# EAGLE board platiene1_v43_eagle (EAGLE 9.7.0)
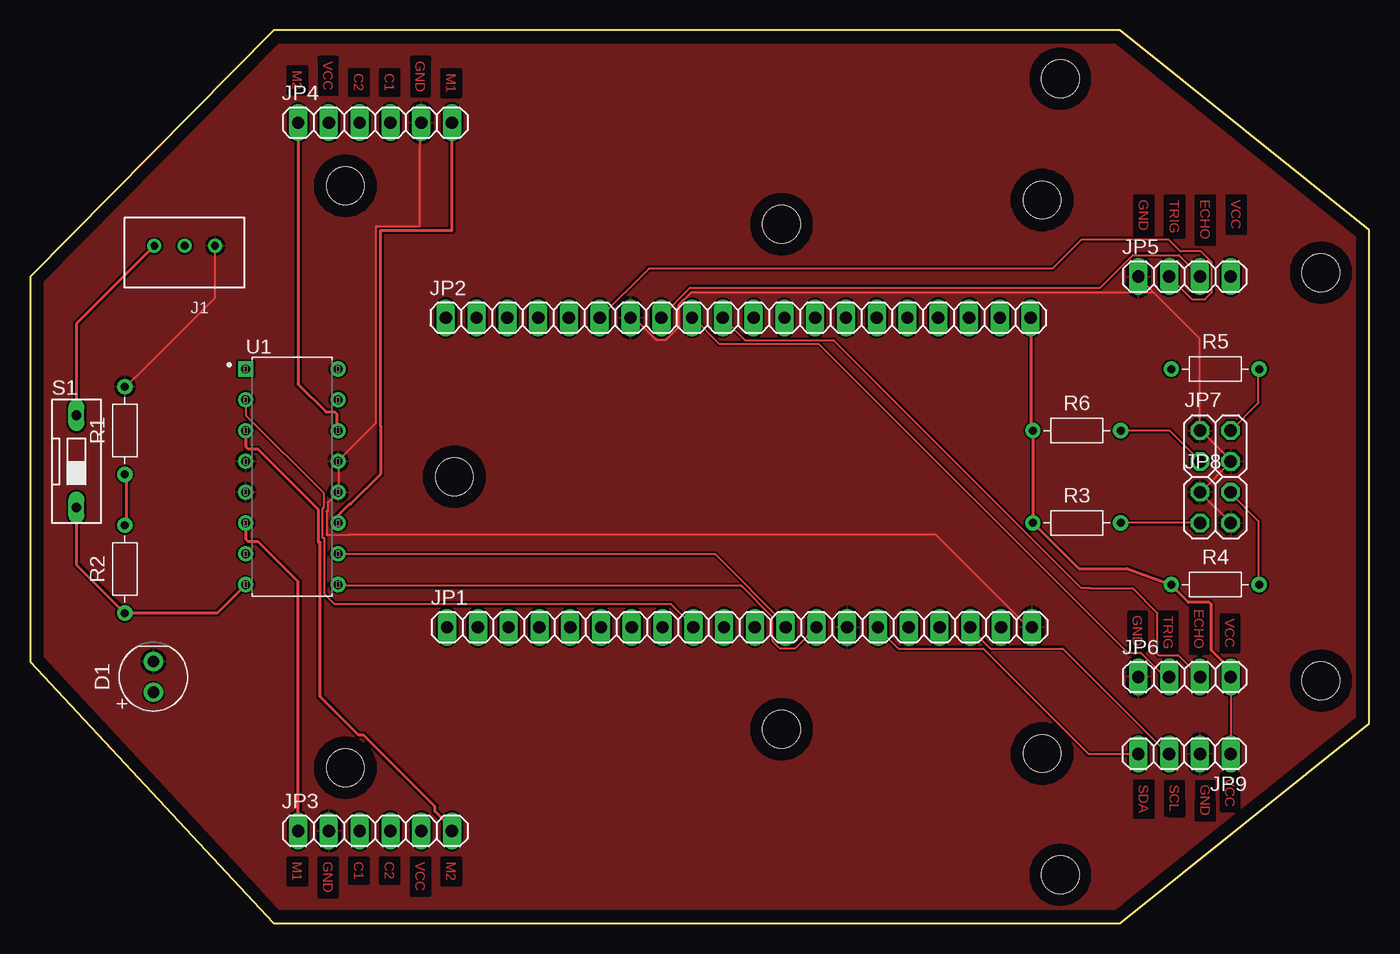
[diagram p0: board, top side]
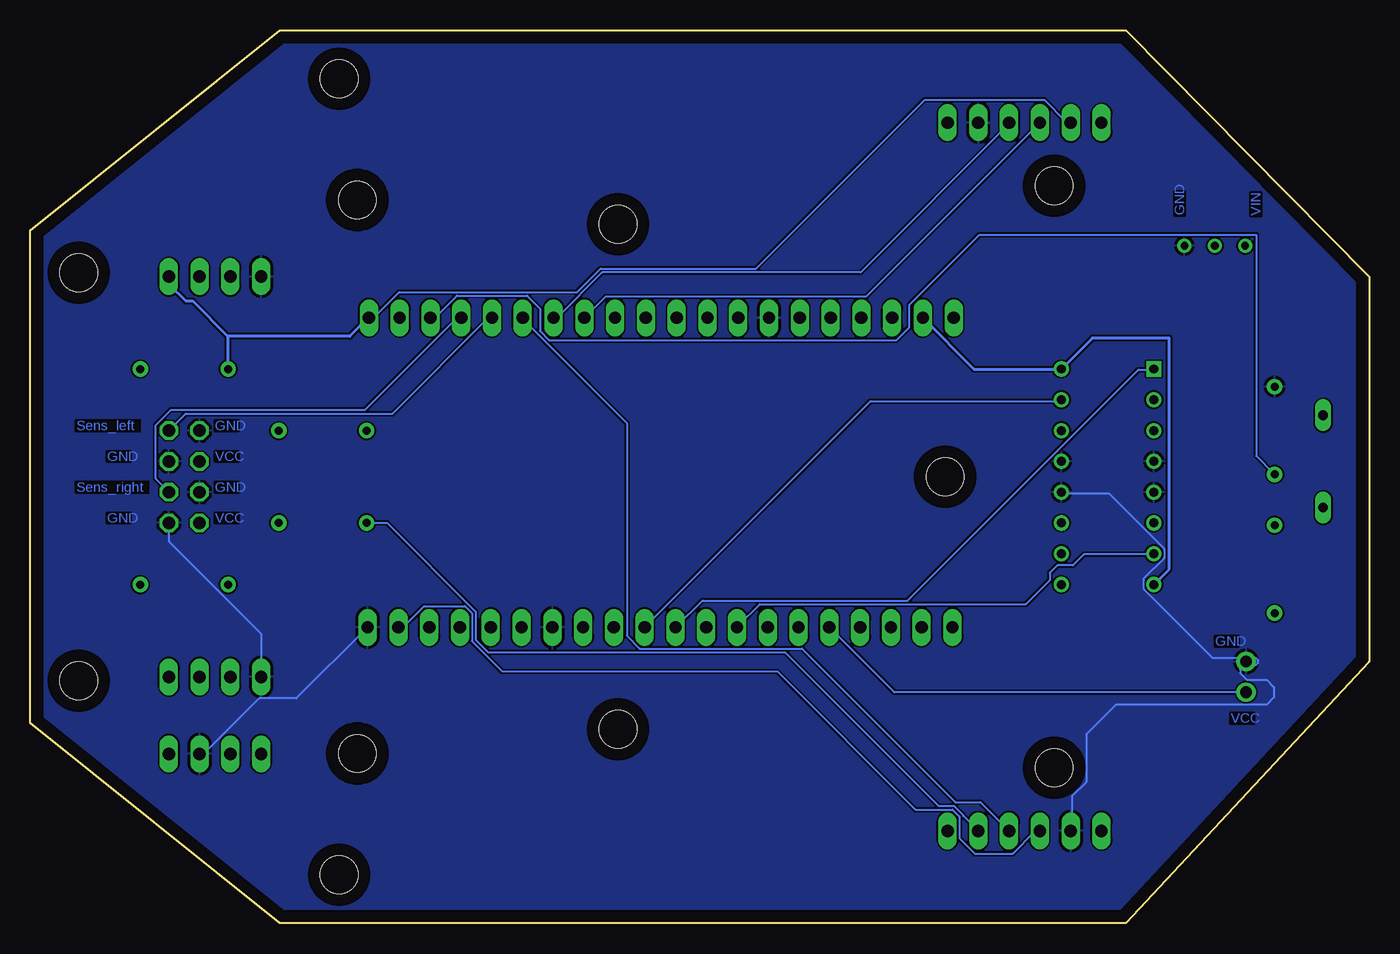
[diagram p1: board, bottom side, seen from below]

Size 110.49 x 73.66 mm. Coordinates in mm from the lower left corner, seen from the top.
Outline: 0,53.34 0,21.59 20.07,0 89.92,0 110.49,16.51 110.49,57.15 89.92,73.66 20.07,73.66 0,53.34
Copper layers (1*16): Top 0.035mm / dielectric 1.5mm / Bottom 0.035mm
Design rules "default": minimum track width 6mil, minimum drill 0.35mm, track to track 6mil, track to pad 6mil, pad to pad 6mil, via to via 6mil, smd to smd 6mil, copper to edge 40mil, drill to drill 6mil, minimum pad ring 10mil, minimum via ring 8mil, stop-mask expansion 4mil, vias tented up to drill 0mil, thermal gap 10mil
Holes 3.1 mm at 85,4 83.5,14 62,16 62,57.66 83.5,59.66 85,69.66 26,12.83 26,60.83 35,36.83 106.49,53.66 106.49,20

## Footprints (pad centres in the part's own frame; a part is rotated, then mirrored left to right if it is on the bottom)
LEDRD254W60D565H860B = drill 0.981 pad 1.581: 1 -1.27,0; 2 1.27,0
B3B-XH-A = drill 0.64: 1 0,0; 2 2.5,0; 3 5,0
1X20 = drill 1.016 long: 1 -24.13,0; 2 -21.59,0; 3 -19.05,0; 4 -16.51,0; 5 -13.97,0; 6 -11.43,0; 7 -8.89,0; 8 -6.35,0; 9 -3.81,0; 10 -1.27,0; 11 1.27,0; 12 3.81,0; 13 6.35,0; 14 8.89,0; 15 11.43,0; 16 13.97,0; 17 16.51,0; 18 19.05,0; 19 21.59,0; 20 24.13,0
1X06 = drill 1.016 long: 1 -6.35,0; 2 -3.81,0; 3 -1.27,0; 4 1.27,0; 5 3.81,0; 6 6.35,0
1X04 = drill 1.016 long: 1 -3.81,0; 2 -1.27,0; 3 1.27,0; 4 3.81,0
2X02 = drill 1.016 octagon: 1 -1.27,-1.27; 2 -1.27,1.27; 3 1.27,-1.27; 4 1.27,1.27
RESAD724W46L381D178B = drill 0.66 pad 1.26: 1 -3.62,0; 2 3.62,0
DS-01 = drill 0.813 long: 1 0,-3.81; 2 0,3.81
DIP-16_300MIL = drill 0.74 pad 1.14 square: 1 -3.81,8.89 | drill 0.74 pad 1.14: 2 -3.81,6.35; 3 -3.81,3.81; 4 -3.81,1.27; 5 -3.81,-1.27; 6 -3.81,-3.81; 7 -3.81,-6.35; 8 -3.81,-8.89; 9 3.81,-8.89; 10 3.81,-6.35; 11 3.81,-3.81; 12 3.81,-1.27; 13 3.81,1.27; 14 3.81,3.81; 15 3.81,6.35; 16 3.81,8.89

## Placement (x,y rotation side)
D1  LED_RED  [LEDRD254W60D565H860B]  10.16,20.32 90 top
J1  7.4V  [B3B-XH-A]  15.24,55.88 180 top
JP1  PinLeiste 1 ESP32  [1X20]  58.52,24.41 0 top
JP2  PINLeiste2 ESP32  [1X20]  58.42,49.95 0 top
JP3  Motor_1  [1X06]  28.45,7.62 0 top
JP4  Motor_2  [1X06]  28.45,66.04 0 top
JP5  Ultraschall_2  [1X04]  95.25,53.34 0 top
JP6  Ultraschall_1  [1X04]  95.25,20.32 0 top
JP7  Liniensensor_2  [2X02]  97.79,39.37 0 top
JP8  Liniensensor_1  [2X02]  97.79,34.29 0 top
JP9  I2C  [1X04]  95.25,13.97 180 top
R1  7,5k  [RESAD724W46L381D178B]  7.81,40.64 90 top
R2  30k  [RESAD724W46L381D178B]  7.81,29.21 90 top
R3  100  [RESAD724W46L381D178B]  86.36,33.02 0 top
R4  10k  [RESAD724W46L381D178B]  97.79,27.94 0 top
R5  10k  [RESAD724W46L381D178B]  97.79,45.72 0 top
R6  100  [RESAD724W46L381D178B]  86.36,40.64 0 top
S1  DS01  [DS-01]  3.81,38.1 0 top
U1  L293DNE  [DIP-16_300MIL]  21.59,36.83 0 top

## Library data of the parts
D1 = Opto-Electronic; CATEGORY: Opto-Electronic; SUB-CATEGORY: LED
J1 = Connector; CATEGORY: CONNECTOR; DESCRIPTION: 2.5mm pitch/disconnectable crimp style connector; MANUFACTURER: JST (XH connector); MPN: B3B-XH-A; PART_STATUS: ACTIVE; ROHS_COMPLIANT: COMPLIANT; SERIES: B3B-XH-A; SUB_CATEGORY: THROUGH HOLE CONNECTOR; TYPE: SIDE ENTRY
JP1-JP9 = Connector; CATEGORY: CONNECTOR; SUB-CATEGORY: PIN-HEADER
R1-R6 = Resistor; CATEGORY: Resistor; SUB-CATEGORY: Fixed
S1 = Switch; CATEGORY: SWITCH; TYPE: SPST
U1 = IC; CREATED_BY: PCBLayout.com; DIGI-KEY_PART: 296-9518-5-ND; MANUFACTURER: Texas Instruments; MPN: L293DNE; PACKAGE: DIP-16

## Nets
GND: D1.2 J1.1 JP1.14 JP1.20 JP2.7 JP3.2 JP4.5 JP5.1 JP6.1 JP7.2 JP7.3 JP8.2 JP8.3 JP9.2 R1.2 U1.4 U1.5 U1.12 U1.13
N$1: JP1.11 U1.15
N$2: JP1.12 U1.10
N$3: JP1.13 U1.9
N$4: JP1.10 U1.1
N$5: JP1.8 U1.7
N$6: JP1.9 U1.2
N$7: JP2.2 R2.1 S1.1 U1.8 U1.16
N$8: JP2.18 R1.1 R2.2
N$9: JP4.6 U1.11
N$10: JP4.1 U1.14
N$11: JP3.6 U1.3
N$12: JP3.1 U1.6
N$13: JP2.20 JP3.5 JP4.2 JP5.4 JP6.4 JP9.1 R3.1 R4.1 R5.1 R6.1
N$15: JP8.1 R3.2
N$16: JP2.6 JP5.2
N$17: JP7.1 R6.2
N$18: JP2.16 JP7.4 R5.2
N$19: JP2.17 JP8.4 R4.2
N$20: D1.1 JP1.5
N$21: JP2.8 JP5.3
N$22: JP2.9 JP6.2
N$23: JP2.13 JP4.3
N$24: JP2.10 JP6.3
N$27: JP2.14 JP4.4
N$28: JP2.15 JP3.4
N$29: JP1.19 JP3.3
N$30: JP1.18 JP9.3
N$31: JP1.15 JP9.4
VCC: J1.3 S1.2

## Tracks (layer width: path | path; a pad name or v marks a point on that pad's centre or on a via)
GND
  Top 0.152: J1.1 15.24,51.61 9.75,46.13 7.92,44.3 | JP4.5 32.16,65.94 32.16,57.51 28.54,57.51 28.54,41.29 25.4,38.15 U1.13 25.45,38.05 25.45,35.61 U1.12 24.54,34.7 24.54,33.97 24.45,33.97 24.45,32.07 26.35,32.07 26.35,32.11 74.68,32.11 82.3,24.49 82.6,24.49 JP1.20 | JP8.3 JP8.2 96.62,35.61 99.06,38.05 JP7.3 99.06,38.2 96.62,40.64 JP7.2 96.47,40.64 96.47,48.26 92.71,52.02 | 92.71,52.02 54.51,52.02 53.49,51 53.49,49.17 52.43,48.11 51.66,48.11 49.84,49.94 49.53,49.94 JP2.7 | 92.71,52.02 91.44,53.29 JP5.1
  Bottom 0.152: JP9.2 96.16,13.97 91.59,18.54 88.54,18.54 82.75,24.33 JP1.20 | JP3.2 24.54,7.72 24.54,10.46 23.36,11.64 23.36,15.57 20.9,18.03 8.47,18.03 7.87,18.63 7.87,19.47 8.47,20.07 10.09,20.07 10.64,20.62 10.64,20.93 10.29,21.29 9.37,21.29 9.2,21.46 9.2,21.72 9.37,21.89 12.94,21.89 18.63,27.59 18.63,28.41 16.92,30.12 16.92,30.89 21.49,35.46 25.3,35.46 U1.12 | JP6.1 91.44,23.88 99.06,31.5 JP8.3
  pour Top: 88.9,71.12 19.05,71.12 19.05,68.58 16.51,68.58 16.51,66.04 13.97,66.04 13.97,63.5 11.43,63.5 11.43,60.96 8.89,60.96 8.89,59.69 6.35,59.69 6.35,57.15 2.54,57.15 2.54,21.59 6.35,21.59 6.35,19.05 11.43,19.05 11.43,12.7 13.97,12.7 13.97,8.89 17.78,8.89 17.78,3.81 19.05,3.81 19.05,1.27 90.17,1.27 90.17,7.62 93.98,7.62 93.98,10.16 99.06,10.16 99.06,12.7 101.6,12.7 101.6,16.51 106.68,16.51 106.68,58.42 104.14,58.42 104.14,60.96 100.33,60.96 100.33,63.5 96.52,63.5 96.52,66.04 92.71,66.04 92.71,68.58 88.9,68.58
  pour Bottom: 20.32,73.66 0,53.34 0,21.59 20.32,0 90.17,0 110.49,16.51 110.49,57.15 90.17,73.66
  pour Top: -12.7,78.74 113.03,78.74 113.03,-7.62 -12.7,-7.62
  pour Bottom: -11.43,78.74 -11.43,-3.81 111.76,-3.81 111.76,78.74
N$1
  Bottom 0.152: U1.15 25.45,43.08 41.15,43.08 59.74,24.49 JP1.11
N$2
  Top 0.152: JP1.12 62.33,24.64 56.54,30.43 25.45,30.43 U1.10
N$3
  Top 0.152: U1.9 25.45,27.84 58.67,27.84 61.27,25.25 61.27,23.27 61.87,22.66 63.09,22.66 64.77,24.33 JP1.13
N$4
  Bottom 0.152: U1.1 17.83,45.67 19.05,45.67 38.1,26.62 55.02,26.62 57.15,24.49 JP1.10
N$5
  Bottom 0.152: U1.7 17.83,30.43 23.54,30.43 24.45,29.53 25.72,29.53 26.35,28.89 26.35,28.31 28.35,26.31 50.29,26.31 52.12,24.49 JP1.8
N$6
  Top 0.152: U1.2 17.83,43.08 17.83,41.86 24.23,35.46 24.23,34.28 24.14,34.28 24.14,31.76 24.28,31.76 24.28,27.15 25.12,26.31 52.88,26.31 54.71,24.49 JP1.9
N$7
  Top 0.254: S1.1 3.81,29.59 R2.1 15.43,25.59 U1.8
  Bottom 0.254: JP2.2 32.6,45.72 U1.16 22.86,48.26 16.51,48.26 16.51,29.21 U1.8
N$8
  Top 0.152: 7.92,32.87 R2.2 | R1.1 7.92,36.98
  Top 0.254: 7.92,36.98 7.92,32.87
  Bottom 0.152: JP2.18 77.42,50.09 76.96,50.09 75.29,51.77 69.49,51.77 68.43,50.7 68.43,48.87 67.67,48.11 39.01,48.11 37.95,49.17 37.95,51 32.16,56.79 9.34,56.79 9.34,38.55 7.92,37.13 R1.1
N$9
  Top 0.152: U1.11 25.45,33.02 25.45,33.7 | 34.8,65.53 JP4.6
  Top 0.254: 25.45,33.7 26.3,34.55 26.41,34.55 28.89,37.04 28.89,40.64 28.89,41.03 28.89,57.15 34.8,57.15 JP4.6
N$10
  Top 0.152: 25.3,40.64 U1.14
  Top 0.254: 25.3,40.64 25.3,42.01 25.14,42.17 24.39,42.17 22.1,44.47 JP4.1
N$11
  Top 0.152: 17.83,40.64 U1.3 | JP3.6 34.9,7.72
  Top 0.254: 17.83,40.64 17.83,39.27 17.99,39.1 18.79,39.1 23.79,34.1 23.79,31.41 23.93,31.41 23.93,18.69 27.1,15.52 27.5,15.52 33.4,9.63 33.4,9.22 34.9,7.72
N$12
  Top 0.152: 17.83,33.02 U1.6
  Top 0.254: 17.83,33.02 17.83,31.65 17.99,31.48 18.79,31.48 22.1,28.17 JP3.1
N$13
  Top 0.152: 94.18,27.84 R4.1 | 99.06,20.37 JP6.4 JP9.1 | 82.75,40.64 R6.1 82.6,40.64 | 82.75,33.02 R3.1 | 82.6,49.94 JP2.20
  Top 0.254: 82.75,40.64 82.75,33.02 86.51,29.26 90.55,29.26 R4.1 | 82.6,40.64 82.6,49.94 | 99.06,20.37 99.06,20.93 97.46,22.53 97.46,26.3 97.3,26.46 95.56,26.46 94.18,27.84
  Bottom 0.152: 94.18,45.82 R5.1 | JP5.4 99.06,53.29 | JP4.2 24.69,66.09 24.99,66.09 26.82,67.92 36.68,67.92 50.6,54 63.42,54 65.35,52.07 80.05,52.07 82.17,49.95 JP2.20 82.6,49.94 | R3.1 81.04,33.02 73.74,25.71 73.74,23.39 72.69,22.35 48.21,22.35 35.53,9.68 34.26,9.68 33.5,8.92 33.5,8.86 JP3.5
  Bottom 0.254: 94.18,48.41 94.18,45.82 | 94.18,48.41 84.12,48.41 82.6,49.94 | 94.18,48.41 97.1,51.33 97.66,51.33 99.06,52.73 99.06,53.29
N$15
  Top 0.152: JP8.1 R3.2
N$16
  Top 0.152: JP5.2 95.86,51.46 96.93,51.46 97.51,52.05 97.51,54.51 96.6,55.42 94.92,55.42 93.94,56.4 86.75,56.4 84.35,54 51.05,54 JP2.6
N$17
  Top 0.152: R6.2 94.03,40.64 96.47,38.2 JP7.1
N$18
  Top 0.152: JP7.4 101.35,42.93 101.35,45.67 R5.2
  Bottom 0.152: JP2.16 72.39,49.94 72.69,49.94 80.59,42.04 97.66,42.04 JP7.4
N$19
  Top 0.152: R4.2 101.35,27.99 101.35,33.17 99.06,35.46 JP8.4
  Bottom 0.152: JP2.17 74.98,49.94 75.29,49.94 82.88,42.34 98.88,42.34 100.13,41.1 100.13,36.68 99.06,35.61 JP8.4
N$20
  Bottom 0.152: D1.1 39.19,19.05 JP1.5
N$21
  Top 0.152: JP2.8 52.12,50.09 54.46,52.43 88.29,52.43 90.98,55.12 94.79,55.12 96.47,53.44 JP5.3
N$22
  Top 0.152: JP6.2 93.88,20.37 93.57,20.37 91.65,22.29 90.57,22.29 65.06,47.8 56.84,47.8 54.71,49.94 JP2.9
N$23
  Bottom 0.152: JP4.3 41.52,51.7 63.02,51.7 JP2.13
N$24
  Top 0.152: JP2.10 57.15,49.94 58.98,48.11 66.29,48.11 86.72,27.69 87.43,27.69 87.43,27.63 90.97,27.63 92.97,25.63 92.97,22.24 93.11,22.11 94.73,22.11 JP6.3
N$27
  Bottom 0.152: JP2.14 67.21,50.09 66.9,50.09 63.3,53.7 41.96,53.7 29.72,65.94 JP4.4
N$28
  Bottom 0.152: JP2.15 69.95,49.94 61.27,41.25 61.27,23.72 60.2,22.66 46.81,22.66 34.13,9.98 32.08,9.98 JP3.4
N$29
  Bottom 0.152: JP3.3 27.28,7.57 27.58,7.57 29.41,5.74 32.54,5.74 33.81,7.01 33.81,8.79 34.39,9.37 37.44,9.37 48.85,20.78 71.55,20.78 74.04,23.27 74.04,25.59 74.62,26.17 77.98,26.17 79.73,24.41 JP1.19
N$30
  Top 0.152: JP9.3 93.88,13.97 85.19,22.66 79.25,22.66 77.57,24.33 JP1.18
N$31
  Top 0.152: JP9.4 87.33,13.97 78.64,22.66 71.63,22.66 69.95,24.33 JP1.15
VCC
  Top 0.254: J1.3 3.81,49.45 S1.2

## Text on the board
Top: VCC | GND | M2 | C2 | C1 | M1 | GND | TRIG | ECHO | VCC | ECHO | GND | TRIG | VCC | VCC | SDA | SCL | GND | M1 | GND | C1 | C2 | VCC | M2
Bottom: VIN | GND | GND | Sens_left | VCC | GND | GND | Sens_right | VCC | GND | GND | VCC